# Altium PCB FPGA Board V1.PcbDoc (part 3 of 3)
Units mil, origin at the board's own origin, x right, y up, seen from the top; angles counter-clockwise.
Board outline 3460 x 2420 mil, 8 copper layers (Layer 1, Layer 2, Layer 3, Layer 4, Layer 5, Layer 6, Layer 7, Layer 8), stack 40.159 mil thick; 81 components, 311 nets, 1100 pads, 152 vias.
Unrouted connection lines stored in the file: 594.
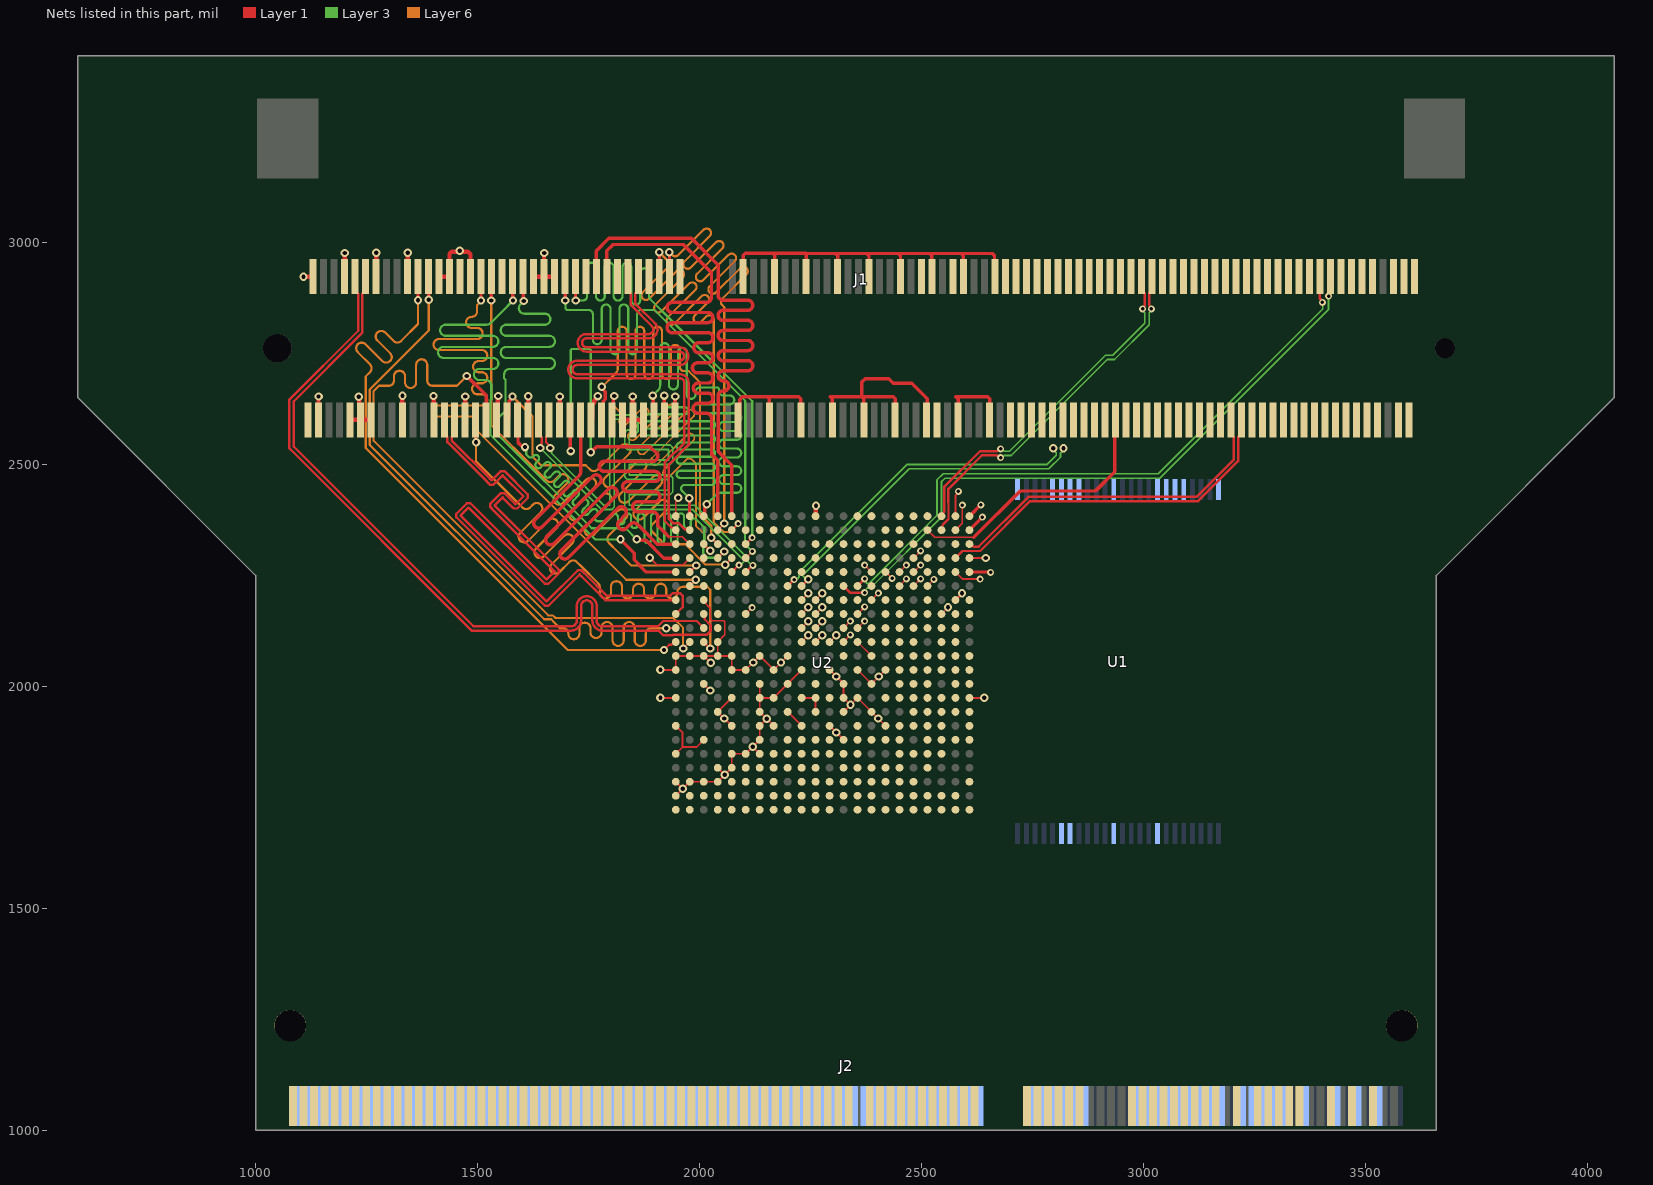
[diagram p8: the nets of this part, all layers, seen from the top]

## Via types
v1: diameter 18.9, hole 9.84, Layer 1 to Layer 8, 113 vias
v2: diameter 15.75, hole 7.87, Layer 1 to Layer 8, 39 vias

## Nets (pads, with @x,y where several pads share a name; then routed paths per layer and width w, separated by ;. In a path a pad name is that pad's centre, name@x,y a point inside that pad or via, vN(x,y) a via of type N, cw(c..) or ccw(c..) an arc to the next point about the centre after c; other vN are vias at no path point) (continued)
DQ10: J1.33 U2.C13 | length 1544.7
  Layer 1 w5: U2.C13@2009.55,2100.03 v1(2024.4,2085.18)
  Layer 1 w7.7: J1.33@1495.99,2600.17 1496.37,2599.79 1496.37,2550.13 v1(1496.75,2549.75)
  Layer 6 w4.92: v1(1496.75,2549.75) 1496.75,2507.25 1587.74,2416.26 1600.9,2403.1 ccw(c1609.71,2411.91) 1618.52,2403.1 1624.88,2409.46 cw(c1633.69,2400.65) 1642.5,2409.46 cw(c1633.69,2400.65) 1642.5,2391.84 1596.45,2345.79 ccw(c1605.27,2336.98) 1596.45,2328.16 ccw(c1605.27,2336.98) 1614.08,2328.16 1660.13,2374.21 cw(c1668.94,2365.4) 1677.75,2374.21 cw(c1668.94,2365.4) 1677.75,2356.59 1631.7,2310.54 ccw(c1640.51,2301.73) 1631.7,2292.92 ccw(c1640.51,2301.73) 1649.32,2292.92 1695.37,2338.97 cw(c1704.18,2330.16) 1712.99,2338.97 cw(c1704.18,2330.16) 1712.99,2321.34 1666.95,2275.3 ccw(c1675.76,2266.48) 1666.95,2257.67 ccw(c1675.76,2266.48) 1684.57,2257.67 1706.64,2279.74 cw(c1715.45,2270.93) 1724.26,2279.74 1726,2278 1732.97,2271.03 1771.97,2232.03 cw(c1763.16,2223.22) 1775.62,2223.22 1775.62,2210.42 ccw(c1788.08,2210.42) 1800.54,2210.42 1800.54,2224.46 cw(c1813,2224.46) 1825.46,2224.46 1825.46,2210.38 ccw(c1837.93,2210.38) 1850.39,2210.38 1850.39,2218.7 cw(c1862.85,2218.7) 1875.31,2218.7 1875.31,2210.38 ccw(c1887.77,2210.38) 1900.23,2210.38 1900.23,2218.7 cw(c1912.69,2218.7) 1925.15,2218.7 1925.15,2210.38 ccw(c1937.62,2210.38) 1950.08,2210.38 1950.08,2211.71 cw(c1962.54,2211.71) 1962.54,2224.17 1965,2224.17 2017.83,2224.17 2024.4,2217.6 v1(2024.4,2085.18)
DQ11: J1.35 U2.B13 | length 1546.6
  Layer 1 w4: v1(1963.21,2085.18) U2.B13@1978.06,2100.03
  Layer 1 w7.7: v1(1476,2699) 1519.61,2655.39 J1.35@1519.61,2600.17
  Layer 6 w4.92: v1(1476,2699) 1454,2677 1442,2677 1399.15,2677 cw(c1399.15,2689.46) 1386.69,2689.46 1386.69,2724.2 ccw(c1374.23,2724.2) 1361.77,2724.2 1361.77,2684.46 cw(c1349.31,2684.46) 1336.85,2684.46 1336.85,2698.46 ccw(c1324.38,2698.46) 1311.92,2698.46 1311.92,2689.46 cw(c1299.46,2689.46) 1299.46,2677 1297,2677 1278,2677 1266.09,2665.09 1266.09,2552.91 1659.08,2159.92 1669.7,2159.92 1675.62,2154 1941,2154 1963.21,2131.79 v1(1963.21,2085.18)
DQ12: J1.22 U2.A13 | length 1545.3
  Layer 1 w5: v1(1920,2082) 1931.98,2093.98 1937.07,2093.98 1943.12,2100.03 U2.A13@1946.56,2100.03
  Layer 1 w7.7: v1(1366,2870) J1.22@1366.04,2922.97
  Layer 6 w4.92: v1(1366,2870) 1366,2816.87 1366,2816 1328.23,2778.23 cw(c1319.42,2787.04) 1310.61,2778.23 1291.97,2796.87 ccw(c1283.16,2788.06) 1274.35,2796.87 ccw(c1283.16,2788.06) 1274.35,2779.25 1303.17,2750.43 cw(c1294.35,2741.62) 1303.17,2732.81 cw(c1294.35,2741.62) 1285.54,2732.81 1247.88,2770.47 ccw(c1239.07,2761.66) 1230.26,2770.47 ccw(c1239.07,2761.66) 1230.26,2752.84 1257.74,2725.36 cw(c1248.93,2716.55) 1257.74,2707.74 1256,2706 1248.24,2698.24 1248.24,2536.76 1703,2082 v1(1920,2082)
DQ13: J1.24 U2.A14 | length 1544.7
  Layer 1 w5: v1(1925,2131) 1925.26,2131.26 1946.3,2131.26 U2.A14@1946.56,2131.53
  Layer 1 w7.7: J1.24@1389.69,2923 1389.85,2922.85 1389.85,2871.15 v1(1390,2871)
  Layer 6 w4.92: v1(1390,2871) 1390,2801.62 1257.17,2668.79 1257.17,2543.83 1650,2151 1666,2151 1672.02,2144.98 1686,2131 1692.16,2131 cw(c1692.16,2118.54) 1704.62,2118.54 ccw(c1717.08,2118.54) 1729.54,2118.54 1729.54,2131 cw(c1742,2131) 1754.46,2131 1754.46,2121.46 ccw(c1766.93,2121.46) 1779.39,2121.46 1779.39,2132.62 cw(c1791.85,2132.62) 1804.31,2132.62 1804.31,2103.38 ccw(c1816.77,2103.38) 1829.23,2103.38 1829.23,2132.62 cw(c1841.69,2132.62) 1854.15,2132.62 1854.15,2103.38 ccw(c1866.62,2103.38) 1879.08,2103.38 1879.08,2118.54 cw(c1891.54,2118.54) 1891.54,2131 1894,2131 v1(1925,2131)
DQ14: J1.34 U2.B17 | length 1544.9
  Layer 1 w5: U2.B17@1978.06,2226.02 1978.06,2226.09 1991.98,2240.01 v1(1991.98,2240.08)
  Layer 1 w7.7: J1.34@1507.8,2923 1507.9,2922.9 1507.9,2869.1 v1(1508,2869)
  Layer 6 w4.92: v1(1508,2869) 1508,2867.95 1500.94,2860.89 1499.18,2859.13 1499.18,2844.69 cw(c1486.72,2844.69) 1486.72,2832.23 ccw(c1486.72,2819.77) 1486.72,2807.3 1499.18,2807.3 cw(c1499.18,2794.84) 1499.18,2782.38 1413.64,2782.38 ccw(c1413.64,2769.92) 1413.64,2757.46 1509.62,2757.46 cw(c1509.62,2745) 1509.62,2732.54 1502.35,2732.54 ccw(c1502.35,2720.07) 1502.35,2707.61 1509.62,2707.61 cw(c1509.62,2695.15) 1509.62,2682.69 1500.37,2682.69 ccw(c1500.37,2670.23) 1500.37,2657.77 1509.62,2657.77 cw(c1509.62,2645.31) 1509.62,2632.85 1411.64,2632.85 ccw(c1411.64,2620.38) 1411.64,2607.92 1486.72,2607.92 cw(c1486.72,2595.46) 1499.18,2595.46 1499.18,2593 1499.18,2575.82 1834.92,2240.08 v1(1991.98,2240.08)
DQ15: J1.36 U2.B18 | length 1544.7
  Layer 1 w5: U2.B18@1978.06,2257.51 v1(1992.9,2272.36)
  Layer 1 w7.7: v1(1531,2869) 1531.21,2869.21 1531.21,2922.79 J1.36@1531.42,2923
  Layer 6 w4.92: v1(1531,2869) 1531,2588 1628.26,2490.74 1655.21,2463.79 ccw(c1664.02,2472.61) 1672.83,2463.79 1683.48,2474.44 cw(c1692.29,2465.63) 1701.1,2474.44 cw(c1692.29,2465.63) 1701.1,2456.82 1674.76,2430.48 ccw(c1683.57,2421.67) 1674.76,2412.86 ccw(c1683.57,2421.67) 1692.38,2412.86 1745.64,2466.12 cw(c1754.45,2457.3) 1763.27,2466.12 cw(c1754.45,2457.3) 1763.27,2448.49 1710.01,2395.23 ccw(c1718.82,2386.42) 1710.01,2377.61 ccw(c1718.82,2386.42) 1727.63,2377.61 1780.89,2430.87 cw(c1789.7,2422.06) 1798.51,2430.87 cw(c1789.7,2422.06) 1798.51,2413.25 1745.25,2359.99 ccw(c1754.06,2351.18) 1745.25,2342.37 ccw(c1754.06,2351.18) 1762.88,2342.37 1816.13,2395.62 cw(c1824.95,2386.81) 1833.76,2395.62 cw(c1824.95,2386.81) 1833.76,2378 1796.19,2340.43 ccw(c1805,2331.62) 1796.19,2322.81 1815.55,2303.45 1846.64,2272.36 v1(1992.9,2272.36)
DQ16: J1.39 U2.E19 | length 1445.1
  Layer 1 w4: v1(2057.7,2274.16) U2.E19@2072.54,2289.01
  Layer 1 w7.7: J1.39@1566.86,2600.17 1570.88,2604.19 1570.88,2642.09 1578.73,2649.93 v1(1578.73,2652.96)
  Layer 6 w4.92: v1(1578.73,2652.96) 1624,2607.7 1624,2517 1643,2498 1744,2498 1751.5,2490.5 1753.24,2488.76 ccw(c1762.05,2497.57) 1770.86,2488.76 1823.95,2541.85 cw(c1832.76,2533.04) 1841.57,2541.85 cw(c1832.76,2533.04) 1841.57,2524.22 1787.16,2469.81 ccw(c1795.97,2461) 1787.16,2452.19 ccw(c1795.97,2461) 1804.78,2452.19 1859.2,2506.6 cw(c1868.01,2497.79) 1876.82,2506.6 cw(c1868.01,2497.79) 1876.82,2488.98 1822.4,2434.56 ccw(c1831.22,2425.75) 1822.4,2416.94 ccw(c1831.22,2425.75) 1840.03,2416.94 1894.44,2471.36 cw(c1903.25,2462.54) 1912.07,2471.36 cw(c1903.25,2462.54) 1912.07,2453.73 1855.14,2396.81 ccw(c1863.95,2388) 1855.14,2379.18 ccw(c1863.95,2388) 1872.76,2379.18 1910.11,2416.53 cw(c1918.92,2407.72) 1927.74,2416.53 cw(c1918.92,2407.72) 1927.74,2398.91 1894.22,2365.4 ccw(c1903.04,2356.59) 1894.22,2347.78 1912.68,2329.32 1922,2320 1967.77,2320 2013.61,2274.16 v1(2057.7,2274.16)
DQ17: J1.41 U2.D19 | length 1482.8
  Layer 1 w4: U2.D19@2041.05,2289.01 v1(2055.9,2303.86)
  Layer 1 w7.7: J1.41@1590.48,2600.17 1591.24,2599.41 1591.24,2549.24 1599.34,2541.14 1604.86,2541.14 v1(1607,2539)
  Layer 3 w4.92: v1(1607,2539) 1609.67,2536.33 1609.67,2527.03 1609.67,2522.33 1614.34,2517.66 ccw(c1619.61,2522.94) 1624.89,2517.66 1626.14,2518.91 cw(c1631.41,2513.64) 1636.69,2518.91 cw(c1631.41,2513.64) 1636.69,2508.36 1632.25,2503.92 ccw(c1637.53,2498.64) 1632.25,2493.37 ccw(c1637.53,2498.64) 1642.8,2493.37 1652.51,2503.08 cw(c1657.78,2497.8) 1663.06,2503.08 cw(c1657.78,2497.8) 1663.06,2492.52 1653.35,2482.82 ccw(c1658.63,2477.54) 1653.35,2472.27 ccw(c1658.63,2477.54) 1663.91,2472.27 1673.61,2481.97 cw(c1678.89,2476.7) 1684.16,2481.97 cw(c1678.89,2476.7) 1684.16,2471.42 1674.46,2461.71 ccw(c1679.73,2456.44) 1674.46,2451.16 ccw(c1679.73,2456.44) 1685.01,2451.16 1694.72,2460.87 cw(c1699.99,2455.59) 1705.27,2460.87 cw(c1699.99,2455.59) 1705.27,2450.32 1695.56,2440.61 ccw(c1700.84,2435.33) 1695.56,2430.06 ccw(c1700.84,2435.33) 1706.11,2430.06 1715.82,2439.76 cw(c1721.1,2434.49) 1726.37,2439.76 cw(c1721.1,2434.49) 1726.37,2429.21 1716.66,2419.51 ccw(c1721.94,2414.23) 1716.66,2408.95 ccw(c1721.94,2414.23) 1727.22,2408.95 1736.92,2418.66 cw(c1742.2,2413.38) 1747.47,2418.66 cw(c1742.2,2413.38) 1747.47,2408.11 1737.77,2398.4 ccw(c1743.04,2393.13) 1737.77,2387.85 ccw(c1743.04,2393.13) 1748.32,2387.85 1758.03,2397.56 cw(c1763.3,2392.28) 1768.58,2397.56 cw(c1763.3,2392.28) 1768.58,2387.01 1766.31,2384.74 ccw(c1771.59,2379.46) 1771.59,2372 1789.86,2372 1795.04,2377.19 1806.86,2389 1808.7,2389 cw(c1808.7,2381.54) 1816.16,2381.54 1816.16,2372.38 ccw(c1823.62,2372.38) 1831.08,2372.38 1831.08,2382.27 cw(c1838.54,2382.27) 1846,2382.27 1846,2364.08 ccw(c1853.46,2364.08) 1860.92,2364.08 1860.92,2382.27 cw(c1868.39,2382.27) 1875.85,2382.27 1875.85,2330.19 ccw(c1883.31,2330.19) 1890.77,2330.19 1890.77,2382.27 cw(c1898.23,2382.27) 1905.69,2382.27 1905.69,2330.19 ccw(c1913.15,2330.19) 1920.62,2330.19 1920.62,2382.27 cw(c1928.08,2382.27) 1935.54,2382.27 1935.54,2330.19 ccw(c1943,2330.19) 1950.46,2330.19 1950.46,2382.27 cw(c1957.92,2382.27) 1965.38,2382.27 1965.38,2362.21 ccw(c1972.84,2362.21) 1980.31,2362.21 1980.31,2370.68 cw(c1987.77,2370.68) 1993.04,2375.96 2006.34,2362.66 2010.61,2358.39 2010.61,2330.56 2008.45,2328.4 2008.45,2299.11 2017.82,2289.74 2041.78,2289.74 v1(2055.9,2303.86)
DQ18: J1.51 U2.B20 | length 1483.7
  Layer 1 w4: 1931,2337 1961.56,2337 U2.B20@1978.06,2320.5
  Layer 1 w7.7: J1.51@1708.59,2600.17 1709.3,2599.46 1709.3,2530.7 v1(1710,2530) ; v1(1755,2527) 1768,2540 1888.49,2540 1889.42,2539.07 1906,2522.49 1906,2518.19 cw(c1894.65,2518.19) 1894.65,2506.84 1785.69,2506.84 ccw(c1785.69,2495.49) 1785.69,2484.14 1899.42,2484.14 cw(c1899.42,2472.79) 1899.42,2461.44 1838.38,2461.44 ccw(c1838.38,2450.09) 1838.38,2438.74 1899.42,2438.74 cw(c1899.42,2427.39) 1899.42,2416.04 1860.82,2416.04 ccw(c1860.82,2404.69) 1860.82,2393.34 1894.65,2393.34 cw(c1894.65,2381.98) 1906,2381.98 1906,2362 1919,2349 1931,2337
  Layer 3 w4.92: v1(1710,2530) 1710,2757.12 1712.88,2760 1752.12,2760 1755,2757.12 v1(1755,2527)
DQ19: J1.53 U2.A20 | length 1501.6
  Layer 1 w7.7: J1.53@1732.21,2600.17 1732.21,2530.21 1732.21,2482.71 cw(c1720.86,2482.71) 1728.89,2474.69 1629.83,2375.63 ccw(c1637.85,2367.6) 1629.83,2359.58 ccw(c1637.85,2367.6) 1645.88,2359.58 1759.41,2473.11 cw(c1767.44,2465.09) 1775.47,2473.11 cw(c1767.44,2465.09) 1775.47,2457.06 1656.6,2338.19 ccw(c1664.63,2330.17) 1656.6,2322.14 ccw(c1664.63,2330.17) 1672.65,2322.14 1795.16,2444.65 cw(c1803.19,2436.63) 1811.21,2444.65 cw(c1803.19,2436.63) 1811.22,2428.6 1688.71,2306.09 ccw(c1696.73,2298.06) 1688.71,2290.04 ccw(c1696.73,2298.06) 1704.76,2290.04 1815.89,2401.17 cw(c1823.92,2393.15) 1831.94,2401.17 cw(c1823.92,2393.15) 1831.94,2385.12 1819.2,2372.38 ccw(c1827.23,2364.35) 1819.2,2356.33 ccw(c1827.23,2364.35) 1835.25,2356.33 1843.94,2365.01 cw(c1851.96,2356.99) 1859.99,2365.01 1862.71,2362.29 1904.5,2320.5 U2.A20@1946.56,2320.5
DQ20: J1.40 U2.A18 | length 1482.1
  Layer 1 w7.7: J1.40@1578.67,2923 1579.33,2922.33 1579.33,2869.67 v1(1580,2869) ; v1(1822,2331) 1853,2300 1853,2285 1880.49,2257.51 U2.A18@1946.56,2257.51
  Layer 3 w4.92: v1(1580,2869) 1554.29,2843.28 1529.21,2818.21 cw(c1520.4,2827.02) 1520.4,2814.56 1428.14,2814.56 ccw(c1428.14,2802.1) 1428.14,2789.64 1534.46,2789.64 cw(c1534.46,2777.18) 1534.46,2764.72 1423.47,2764.72 ccw(c1423.47,2752.26) 1423.47,2739.8 1534.46,2739.8 cw(c1534.46,2727.33) 1534.46,2714.87 1504.37,2714.87 ccw(c1504.37,2702.41) 1504.37,2689.95 1518.54,2689.95 cw(c1518.54,2677.49) 1531,2677.49 1531,2675.03 1531,2646.41 1529,2644.41 1529,2567 1765,2331 v1(1822,2331)
DQ21: J1.42 U2.A19 | length 1482.2
  Layer 1 w7.7: J1.42@1602.29,2923 1603.14,2922.14 1603.14,2868.86 v1(1604,2868) ; v1(1859,2331) 1861.14,2328.86 1879.6,2328.86 1919.44,2289.01 U2.A19@1946.56,2289.01
  Layer 3 w4.92: v1(1604,2868) 1603.1,2867.1 1596.73,2860.73 ccw(c1605.54,2851.92) 1605.54,2839.46 1651.64,2839.46 cw(c1651.64,2827) 1651.64,2814.54 1564.72,2814.54 ccw(c1564.72,2802.07) 1564.72,2789.61 1661.9,2789.61 cw(c1661.9,2777.15) 1661.9,2764.69 1564.72,2764.69 ccw(c1564.72,2752.23) 1564.72,2739.77 1661.9,2739.77 cw(c1661.9,2727.31) 1661.9,2714.85 1572.46,2714.85 ccw(c1572.46,2702.38) 1560,2702.38 1560,2694 1562.82,2691.18 1562.82,2675 1562.82,2620.21 1548,2605.38 1548,2565 1757,2356 1834,2356 v1(1859,2331)
DQ22: J1.50 U2.F19 | length 1482.4
  Layer 1 w4: U2.F19@2104.04,2289.01 v2(2118.89,2303.86)
  Layer 1 w7.7: J1.50@1696.78,2923 1697.39,2922.39 1697.39,2869.61 v1(1698,2869)
  Layer 3 w4.92: v1(1698,2869) 1698,2851 1701,2848 1721,2848 1749.84,2848 cw(c1749.84,2838.04) 1759.8,2838.04 1759.8,2780.6 ccw(c1769.76,2780.6) 1779.72,2780.6 1779.72,2850.12 cw(c1789.68,2850.12) 1799.64,2850.12 1799.64,2757.96 ccw(c1809.6,2757.96) 1819.56,2757.96 1819.56,2850.12 cw(c1829.53,2850.12) 1839.49,2850.12 1839.49,2757.96 ccw(c1849.45,2757.96) 1859.41,2757.96 1859.41,2838.04 cw(c1869.37,2838.04) 1869.37,2848 1871.83,2848 1898,2848 2102.99,2643.01 2102.99,2359.99 2102.65,2359.65 2102.65,2320.09 v2(2118.89,2303.86)
DQ23: J1.52 U2.F20 | length 1482
  Layer 1 w4: U2.F20@2104.04,2320.5 v2@2118.56,2335.05
  Layer 1 w7.7: J1.52@1720.4,2923 1720.7,2922.7 1720.7,2869.3 v1(1721,2869)
  Layer 3 w4.92: v1(1721,2869) 1734.46,2869 1736.92,2869 ccw(c1736.92,2878.96) 1746.88,2878.96 1746.88,2944.33 cw(c1756.85,2944.33) 1766.81,2944.33 1766.81,2878.96 ccw(c1776.77,2878.96) 1786.73,2878.96 1786.73,2944.33 cw(c1796.69,2944.33) 1806.65,2944.33 1806.65,2878.96 ccw(c1816.61,2878.96) 1826.57,2878.96 1826.57,2944.33 cw(c1836.54,2944.33) 1846.5,2944.33 1846.5,2869.48 ccw(c1856.46,2869.48) 1866.42,2869.48 1866.42,2931.68 cw(c1876.38,2931.68) 1886.34,2931.68 1886.34,2878.78 ccw(c1896.3,2878.78) 1889.26,2871.74 1937,2824 2118.89,2642.11 2118.89,2335.39 v2(2118.56,2335.07)
DQ24: J1.57 U2.D20 | length 1466.9
  Layer 1 w4: v1(2026.52,2335.03) U2.D20@2041.05,2320.5
  Layer 1 w7.7: J1.57@1779.46,2600.17 1783.48,2604.19 1783.48,2641.98 1788.21,2646.71 1788.21,2663.76 1780,2671.97 v1(1780,2675)
  Layer 6 w4.92: v1(1780,2675) 1781,2675 1808.52,2702.52 1810.98,2704.98 ccw(c1798.96,2717.01) 1815.97,2717.01 1815.97,2800.04 cw(c1825.93,2800.04) 1835.89,2800.04 1835.89,2702.61 ccw(c1845.85,2702.61) 1855.81,2702.61 1855.81,2800.04 cw(c1865.77,2800.04) 1875.73,2800.04 1875.73,2702.61 ccw(c1885.69,2702.61) 1895.66,2702.61 1895.66,2800.04 cw(c1905.62,2800.04) 1915.58,2800.04 1915.58,2702.61 ccw(c1925.54,2702.61) 1935.5,2702.61 1935.5,2759.27 cw(c1945.46,2759.27) 1955.42,2759.27 1955.42,2719.96 ccw(c1965.39,2719.96) 1965.39,2710 1976,2710 1992,2694 2000.91,2685.09 2000.91,2414.1 2000.48,2413.67 2000.48,2402.02 2001,2401.5 2001,2388 2026.52,2362.48 v1(2026.52,2335.03)
DQ25: J1.59 U2.C20 | length 1466.6
  Layer 1 w4: U2.C20@2009.55,2320.5 v1(2024.36,2305.7)
  Layer 1 w7.7: J1.59@1803.08,2600.17 1805.86,2602.95 1805.86,2651.86 v1(1808,2654)
  Layer 6 w4: v1(1808,2654) 1808,2631 1809.5,2629.5 1821.52,2617.48 cw(c1814.8,2610.76) 1821.52,2604.05 ccw(c1828.24,2597.33) 1821.52,2590.61 ccw(c1828.24,2597.33) 1834.95,2590.61 1869.17,2624.83 cw(c1875.89,2618.11) 1882.61,2624.83 cw(c1875.89,2618.11) 1882.61,2611.39 1841.69,2570.47 ccw(c1848.4,2563.76) 1841.69,2557.04 ccw(c1848.4,2563.76) 1855.12,2557.04 1930.4,2632.32 cw(c1937.12,2625.6) 1943.83,2632.32 cw(c1937.12,2625.6) 1943.83,2618.88 1863.82,2538.86 ccw(c1870.54,2532.15) 1863.82,2525.43 ccw(c1870.54,2532.15) 1877.25,2525.43 1972.3,2620.47 cw(c1979.01,2613.76) 1985.73,2620.47 cw(c1979.01,2613.76) 1985.73,2607.04 1893.14,2514.45 ccw(c1899.86,2507.73) 1893.14,2501.01 ccw(c1899.86,2507.73) 1906.57,2501.01 1972.3,2566.73 cw(c1979.01,2560.02) 1985.73,2566.73 cw(c1979.01,2560.02) 1985.73,2553.3 1920.63,2488.19 ccw(c1927.35,2481.48) 1920.63,2474.76 ccw(c1927.35,2481.48) 1934.06,2474.76 1969.93,2510.63 cw(c1976.65,2503.91) 1983.37,2510.63 1984.78,2509.22 1992.45,2501.55 1992.45,2417.6 1992.02,2417.17 1992.02,2361.68 2010.15,2343.55 2010.15,2342.85 2011.07,2341.93 2011.07,2318.99 v1(2024.36,2305.7)
DQ26: J1.67 U2.C22 | length 1505.4
  Layer 1 w7.7: v1(1895,2655) 1896.28,2653.72 1896.28,2601.45 J1.67@1897.57,2600.17 ; U2.C22@2009.55,2383.5 2011.47,2385.41 2011.47,2402.48 2016.39,2407.4 v1(2016.39,2410.43)
  Layer 3 w4.92: v1(1895,2655) 1904,2664 1906.46,2666.46 ccw(c1894.44,2678.49) 1911.44,2678.49 1911.44,2763.04 cw(c1921.4,2763.04) 1931.37,2763.04 1931.37,2678.87 ccw(c1941.33,2678.87) 1951.29,2678.87 1951.29,2752.21 cw(c1961.25,2752.21) 1971.21,2752.21 1971.21,2657.59 ccw(c1981.17,2657.59) 1991.13,2657.59 1991.13,2663.04 cw(c2001.09,2663.04) 2001.09,2673 2028,2673 2041.12,2673 2044,2670.12 2044,2667.51 2044,2665.04 ccw(c2053.96,2665.04) 2053.96,2655.08 2068.34,2655.08 cw(c2068.34,2645.12) 2068.34,2635.16 1993.92,2635.16 ccw(c1993.92,2625.2) 1993.92,2615.24 2084.11,2615.24 cw(c2084.11,2605.28) 2084.11,2595.31 2053.96,2595.31 ccw(c2053.96,2585.35) 2053.96,2575.39 2084.11,2575.39 cw(c2084.11,2565.43) 2084.11,2555.47 2053.96,2555.47 ccw(c2053.96,2545.51) 2053.96,2535.55 2084.11,2535.55 cw(c2084.11,2525.59) 2084.11,2515.62 2053.9,2515.62 ccw(c2053.9,2505.66) 2053.9,2495.7 2084.11,2495.7 cw(c2084.11,2485.74) 2084.11,2475.78 2053.96,2475.78 ccw(c2053.96,2465.82) 2053.96,2455.86 2084.11,2455.86 cw(c2084.11,2445.89) 2084.11,2435.93 2046.02,2435.93 ccw(c2046.02,2425.97) 2038.98,2433.02 2019.34,2413.38 v1(2016.39,2410.43)
DQ27: J1.69 U2.B22 | length 1503.9
  Layer 1 w7.7: v1(1921,2655) 1921.09,2654.91 1921.09,2600.26 J1.69@1921.19,2600.17 ; v1(1977,2424) 1977.53,2423.47 1977.53,2384.02 U2.B22@1978.06,2383.5
  Layer 3 w4.92: v1(1921,2655) 1921,2653.44 1921,2636.8 ccw(c1928.96,2636.8) 1928.96,2628.84 1967.07,2628.84 cw(c1967.07,2620.87) 1967.07,2612.91 1877.65,2612.91 ccw(c1877.65,2604.95) 1877.65,2596.99 2027.12,2596.99 cw(c2027.12,2589.03) 2027.12,2581.07 1877.65,2581.07 ccw(c1877.65,2573.11) 1877.65,2565.14 2027.12,2565.14 cw(c2027.12,2557.18) 2027.12,2549.22 1956.42,2549.22 ccw(c1956.42,2541.26) 1956.42,2533.3 2027.12,2533.3 cw(c2027.12,2525.34) 2027.12,2517.38 1956.42,2517.38 ccw(c1956.42,2509.42) 1956.42,2501.45 2027.12,2501.45 cw(c2027.12,2493.49) 2027.12,2485.53 1956.42,2485.53 ccw(c1956.42,2477.57) 1956.42,2469.61 2027.12,2469.61 cw(c2027.12,2461.65) 2027.12,2453.69 1966.53,2453.69 ccw(c1966.53,2445.73) 1960.9,2440.1 1969.68,2431.32 v1(1977,2424)
DQ28: J1.56 U2.E22 | length 1523.3
  Layer 1 w7.7: J1.56@1767.64,2923 1767.64,2980.64 1796,3009 1982,3009 2042,2949 2042,2885 2042,2881.15 ccw(c2053.35,2881.15) 2053.35,2869.8 2108.86,2869.8 cw(c2108.86,2858.45) 2108.86,2847.1 2053.35,2847.1 ccw(c2053.35,2835.75) 2053.35,2824.4 2108.86,2824.4 cw(c2108.86,2813.05) 2108.86,2801.7 2053.35,2801.7 ccw(c2053.35,2790.35) 2053.35,2779 2108.86,2779 cw(c2108.86,2767.65) 2108.86,2756.29 2053.35,2756.29 ccw(c2053.35,2744.94) 2053.35,2733.59 2108.86,2733.59 cw(c2108.86,2722.24) 2108.86,2710.89 2053.35,2710.89 ccw(c2053.35,2699.54) 2053.35,2688.19 2054.81,2688.19 cw(c2054.81,2676.84) 2054.81,2665.49 2053.35,2665.49 ccw(c2053.35,2654.14) 2042,2654.14 2042,2635.35 2042,2529 2072.54,2498.46 U2.E22@2072.54,2383.5
DQ29: J1.58 U2.D22 | length 1525.3
  Layer 1 w7.7: J1.58@1791.27,2923 1791.27,2980.75 1805.81,2995.3 1963.7,2995.3 2027,2932 2027,2902.72 2027,2876.17 cw(c2015.65,2876.17) 2015.65,2864.82 1938.35,2864.82 ccw(c1938.35,2853.47) 1938.35,2842.12 2018.95,2842.12 cw(c2018.95,2830.77) 2018.95,2819.42 1938.35,2819.42 ccw(c1938.35,2808.07) 1938.35,2796.72 2018.95,2796.72 cw(c2018.95,2785.37) 2018.95,2774.02 1998.35,2774.02 ccw(c1998.35,2762.67) 1998.35,2751.32 2018.95,2751.32 cw(c2018.95,2739.97) 2018.95,2728.62 1995.44,2728.62 ccw(c1995.44,2717.27) 1995.44,2705.92 2018.95,2705.92 cw(c2018.95,2694.57) 2018.95,2683.22 1997.51,2683.22 ccw(c1997.51,2671.87) 1997.51,2660.51 2018.95,2660.51 cw(c2018.95,2649.16) 2018.95,2637.81 1997.51,2637.81 ccw(c1997.51,2626.46) 1997.51,2615.11 2015.65,2615.11 cw(c2015.65,2603.76) 2027,2603.76 2027,2575.9 2027,2523 2041.05,2508.95 U2.D22@2041.05,2383.5
DQ30: J1.68 U2.E21 | length 1465.5
  Layer 1 w4: U2.E21@2072.54,2352 v2(2087.08,2366.58)
  Layer 1 w7.7: v1(1909.1,2978) 1909.24,2977.86 1909.24,2923.14 J1.68@1909.38,2923
  Layer 6 w4.92: v1(1909.1,2978) 1913.17,2973.93 1929,2958.1 cw(c1921.95,2951.06) 1929,2944.02 1872.37,2887.39 ccw(c1879.42,2880.35) 1872.37,2873.31 ccw(c1879.42,2880.35) 1886.46,2873.31 1948.22,2935.07 cw(c1955.27,2928.03) 1962.31,2935.07 cw(c1955.27,2928.03) 1962.31,2920.98 1900.55,2859.22 ccw(c1907.59,2852.18) 1900.55,2845.13 ccw(c1907.59,2852.18) 1914.64,2845.13 1976.4,2906.89 cw(c1983.44,2899.85) 1990.49,2906.9 cw(c1983.44,2899.85) 1990.49,2892.81 1928.72,2831.04 ccw(c1935.77,2824) 1928.72,2816.96 ccw(c1935.77,2824) 1942.81,2816.96 2004.57,2878.72 cw(c2011.62,2871.68) 2018.66,2878.72 cw(c2011.62,2871.68) 2018.66,2864.63 1989.49,2835.46 ccw(c1996.53,2828.42) 1989.49,2821.38 ; 1989.49,2821.37 ccw(c1996.53,2828.42) 2003.58,2821.37 ; 2003.58,2821.38 2015.3,2833.1 cw(c2022.34,2826.05) 2032.3,2826.05 2032.3,2814.84 2032.3,2369.31 2039.99,2361.63 2039.99,2360.26 2049.31,2350.94 2051.06,2350.94 2054,2348 2068.51,2348 v2(2087.08,2366.58)
DQ31: J1.70 U2.D21 | length 1465.6
  Layer 1 w4: U2.D21@2041.05,2352 v1(2055.9,2366.85)
  Layer 1 w7.7: v1(1932,2978) 1932.5,2977.5 1932.5,2923.5 J1.70@1933,2923
  Layer 6 w4.92: v1(1932,2978) 1936.58,2973.42 1938.32,2971.68 ccw(c1945.36,2978.72) 1952.41,2971.68 2009.03,3028.3 cw(c2016.08,3021.26) 2023.12,3028.3 cw(c2016.08,3021.26) 2023.12,3014.21 1966.5,2957.59 ccw(c1973.54,2950.55) 1966.5,2943.5 ccw(c1973.54,2950.55) 1980.58,2943.5 2037.21,3000.13 cw(c2044.25,2993.08) 2051.29,3000.13 cw(c2044.25,2993.08) 2051.29,2986.04 1994.67,2929.42 ccw(c2001.71,2922.37) 1994.67,2915.33 ccw(c2001.71,2922.37) 2008.76,2915.33 2065.38,2971.95 cw(c2072.42,2964.91) 2079.47,2971.95 cw(c2072.42,2964.91) 2079.47,2957.87 2022.85,2901.24 ccw(c2029.89,2894.2) 2022.85,2887.15 ccw(c2029.89,2894.2) 2036.93,2887.15 2091.85,2942.07 cw(c2098.89,2935.03) 2105.94,2942.07 cw(c2098.89,2935.03) 2105.94,2927.98 2051.02,2873.07 ccw(c2058.06,2866.02) 2051.02,2858.98 2055.9,2854.1 2055.9,2816.9 v1(2055.9,2366.85)
DQ32: J1.129 U2.K13 | length 21
  Layer 1 w4: U2.K13@2230.02,2100.03 v1(2244.87,2114.88)
DQ33: J1.131 U2.K14 | length 21
  Layer 1 w4: U2.K14@2230.02,2131.53 v1(2244.87,2146.38)
DQ34: J1.141 U2.M13 | length 21
  Layer 1 w4: U2.M13@2293.02,2100.03 v1(2307.86,2114.88)
DQ35: J1.143 U2.L13 | length 21
  Layer 1 w4: U2.L13@2261.52,2100.03 v1(2276.37,2114.88)
DQ36: J1.130 U2.L14 | length 21
  Layer 1 w4: U2.L14@2261.52,2131.53 v1(2276.37,2146.38)
DQ37: J1.132 U2.L15 | length 21
  Layer 1 w4: U2.L15@2261.52,2163.02 v1(2276.37,2177.87)
DQ38: J1.140 U2.L16 | length 21
  Layer 1 w4: U2.L16@2261.52,2194.52 v1(2276.37,2209.37)
DQ39: J1.142 U2.K16 | length 21
  Layer 1 w4: U2.K16@2230.02,2194.52 v1(2244.87,2209.37)
DQ40: J1.147 U2.W21 | length 607
  Layer 1 w4: U2.W21@2513.49,2352 2529.49,2336 2618,2336
  Layer 1 w7.7: 2618,2336 2722,2440 2892,2440 2935,2483 2935,2598.23 J1.147@2936.94,2600.17
DQ41: J1.149 U2.W22
DQ42: J1.157 U2.AA20
DQ43: J1.159 U2.AA21 | length 62.4
  Layer 1 w4: U2.AA21@2576.48,2352 2592,2367.52 v2(2592,2408)
DQ44: J1.146 U2.AB21 | length 41
  Layer 1 w7.7: U2.AB21@2607.98,2352 v2(2637,2381)
DQ45: J1.148 U2.AB22 | length 36.6
  Layer 1 w7.7: U2.AB22@2607.98,2383.5 2608.24,2383.5 2633.74,2409 v2(2634,2409)
DQ46: J1.158 U2.U20
DQ47: J1.160 U2.V20
DQ48: J1.163 U2.V18 | length 22.4
  Layer 1 w4: U2.V18@2481.99,2257.51 2482.25,2257.51 2497.74,2273 v2(2498,2273)
DQ49: J1.165 U2.V19 | length 22.6
  Layer 1 w4: U2.V19@2481.99,2289.01 v2(2498,2305)
DQ50: J1.175 U2.V17 | length 22.6
  Layer 1 w4: U2.V17@2481.99,2226.02 v2(2498,2242)
DQ51: J1.177 U2.W17 | length 21
  Layer 1 w4: U2.W17@2513.49,2226.02 2513.49,2226.25 2528,2240.76 v2(2528,2241)
DQ52: J1.164 U2.AA18 | length 62
  Layer 1 w4: U2.AA18@2576.48,2257.51 2591.99,2242 2631.79,2242 v2(2632,2241.79)
DQ53: J1.166 U2.AB18 | length 48.2
  Layer 1 w7.7: U2.AB18@2607.98,2257.51 2655.49,2257.51 v2(2656,2257)
DQ54: J1.174 U2.U17 | length 22.4
  Layer 1 w4: U2.U17@2450.5,2226.02 2450.5,2226.26 2466,2241.76 v2(2466,2242)
DQ55: J1.176 U2.U18 | length 21.9
  Layer 1 w4: U2.U18@2450.5,2257.51 v2(2466,2273)
DQ56: J1.181 U2.P14 | length 22.4
  Layer 1 w4: U2.P14@2356.01,2131.53 2356.27,2131.53 2371.74,2147 v2(2372,2147)
DQ57: J1.183 U2.R14
DQ58: J1.191 U2.R18 | length 21.9
  Layer 1 w4: v2(2372,2273) U2.R18@2387.5,2257.51
DQ59: J1.193 U2.T18 | length 21
  Layer 1 w4: U2.T18@2419,2257.51 2419.24,2257.51 2433.76,2243 v2(2434,2243)
DQ60: J1.180 U2.P15 | length 22.6
  Layer 1 w4: U2.P15@2356.01,2163.02 v2(2372,2179)
DQ61: J1.182 U2.R16 | length 21.9
  Layer 1 w4: U2.R16@2387.5,2194.52 v2(2403,2210)
DQ62: J1.192 U2.N13 | length 22.4
  Layer 1 w4: U2.N13@2324.51,2100.03 2324.51,2100.27 2340,2115.76 v2(2340,2116)
DQ63: J1.194 U2.N14 | length 21.9
  Layer 1 w4: U2.N14@2324.51,2131.53 v2(2340,2147)
DQS0_N: J1.10 U2.C15 | length 1731.6
  Layer 1 w5.54: J1.10@1224.34,2923 1224.34,2891.5 1231.38,2884.46 1231.38,2800.87 1076.46,2645.95 1076.46,2536.05 1079.25,2533.25 1486.74,2125.77 1703.43,2125.77 1710.97,2125.77 ccw(c1710.97,2148.08) 1733.28,2148.08 1733.28,2180.88 cw(c1746.05,2180.88) 1746.05,2193.65 cw(c1746.05,2180.88) 1758.82,2180.88 1758.82,2148.08 ccw(c1781.12,2148.08) 1781.12,2125.77 1807.88,2125.77 1907.29,2125.77 1918.28,2114.78 1939.21,2114.78 1940.33,2115.9 2016.03,2115.9 2025.18,2125.05 2025.18,2138 2011.88,2151.3 2011.88,2160.69 U2.C15@2009.55,2163.02
DQS0_P: J1.12 U2.C14 | length 1658.4
  Layer 1 w5.54: J1.12@1247.96,2923 1247.96,2891.5 1240.92,2884.46 1240.92,2796.92 1086,2642 1086,2540 1490.69,2135.31 1703.43,2135.31 1710.97,2135.31 ccw(c1710.97,2148.08) 1723.74,2148.08 1723.74,2180.88 cw(c1746.05,2180.88) 1746.05,2203.19 cw(c1746.05,2180.88) 1768.35,2180.88 1768.35,2148.08 ccw(c1781.12,2148.08) 1781.12,2135.31 1807.88,2135.31 1906.37,2135.31 1918.28,2147.22 1993.86,2147.22 U2.C14@2009.55,2131.53
DQS1_N: J1.27 U2.A16 | length 1554.6
  Layer 1 w5.54: J1.27@1425.13,2600.17 1425.13,2568.67 1432.17,2561.63 1432.17,2550.08 1521.06,2461.19 1524.99,2457.25 1527.78,2454.46 1535.69,2454.46 1556.54,2475.31 1603.59,2428.26 1585.53,2410.2 1560.49,2435.24 1552.59,2435.24 1528.94,2411.6 1528.94,2403.69 1531.73,2400.9 1673.84,2258.8 1655.78,2240.74 1484.1,2412.41 1476.2,2412.41 1452.55,2388.77 1452.55,2380.87 1651.83,2181.59 1659.73,2181.59 1730.19,2252.05 1734.12,2248.12 1787.92,2194.32 1946.36,2194.32 U2.A16@1946.56,2194.52
DQS1_P: J1.29 U2.A15 | length 1606.7
  Layer 1 w5.54: J1.29@1448.75,2600.17 1448.75,2568.67 1441.71,2561.63 1441.71,2554.03 1527.8,2467.93 1531.73,2464 1552.59,2484.85 1560.49,2484.85 1613.13,2432.21 1613.13,2424.31 1589.48,2400.66 1581.58,2400.66 1580.2,2402.04 cw(c1583.56,2405.43) 1580.16,2402.08 1556.54,2425.7 1538.48,2407.65 1683.37,2262.75 1683.37,2254.85 1659.73,2231.2 1651.83,2231.2 1480.15,2402.88 1462.09,2384.82 1655.78,2191.13 1726.24,2261.59 1734.14,2261.59 1736.93,2258.8 1740.87,2254.87 1791.87,2203.86 1933.61,2203.86 1939.9,2210.15 1955.76,2210.15 1962.19,2203.72 1962.19,2178.65 U2.A15@1946.56,2163.02
DQS2_N: J1.45 U2.E18 | length 1486.3
  Layer 1 w5.54: J1.45@1637.72,2600.17 1637.72,2568.67 1644.77,2561.63 1644.77,2546.92 1643.66,2545.82 1643.66,2539.56 v1(1641.1,2537) ; U2.E18@2072.54,2257.51 2073.03,2257.51 2088.52,2273 v2(2089,2273)
  Layer 3 w4: v1(1641.1,2537) 1779.91,2398.19 1793,2398.19 1801.99,2398.19 1807.78,2403.98 1807.78,2601.48 1851.35,2601.48 1851.35,2577.48 1837.56,2577.48 1831.78,2571.69 1831.78,2539.5 1837.56,2533.71 1930.12,2533.71 1930.12,2509.71 1837.56,2509.71 1831.77,2503.93 1831.77,2471.74 1837.56,2465.95 1930.12,2465.95 1930.12,2441.95 1837.56,2441.95 1831.77,2436.16 1831.77,2403.98 1837.56,2398.19 1942,2398.19 1985.21,2398.19 2099.63,2283.77 2099.63,2280.46 2092.17,2273 v2(2089,2273)
DQS2_P: J1.47 U2.F18 | length 1483
  Layer 1 w5.54: J1.47@1661.35,2600.17 1661.35,2568.67 1654.3,2561.63 1654.3,2549.94 1664,2540.24 v1(1664,2537) ; U2.F18@2104.04,2257.51 2104.49,2257.51 2119.69,2272.72 v2(2120.14,2272.72)
  Layer 3 w4: v1(1664,2537) 1666.46,2534.54 1666.46,2525.61 1784,2408.07 1793,2408.07 1797.89,2408.07 1797.89,2605.57 1803.68,2611.36 1855.44,2611.36 1861.23,2605.57 1861.23,2573.38 1855.44,2567.59 1841.66,2567.59 1841.66,2543.59 1934.21,2543.59 1940,2537.81 1940,2505.62 1934.21,2499.83 1841.66,2499.83 1841.66,2475.83 1934.21,2475.83 1940,2470.04 1940,2437.86 1934.21,2432.07 1841.66,2432.07 1841.66,2408.07 1942,2408.07 1989.3,2408.07 2109.51,2287.86 2109.51,2280.46 2117.25,2272.72 v2(2120.14,2272.72)
DQS3_N: J1.62 U2.A21 | length 1505.9
  Layer 1 w5.54: J1.62@1838.51,2923 1838.51,2891.5 1845.55,2884.46 1845.55,2876.76 1845.55,2858.58 1892.98,2811.16 cw(c1885.76,2803.85) 1885.76,2793.58 1745.74,2793.58 ccw(c1745.74,2773.77) 1725.94,2773.77 ccw(c1745.74,2773.77) 1745.74,2753.97 1955.19,2753.97 cw(c1955.19,2743.7) 1965.46,2743.7 cw(c1955.19,2743.7) 1955.19,2733.43 1724.43,2733.43 ccw(c1724.43,2713.62) 1704.62,2713.62 ccw(c1724.43,2713.62) 1724.43,2693.81 1955.73,2693.81 cw(c1955.73,2683.54) 1966,2683.54 1966,2676 1966,2548.49 1921.39,2503.88 1921.39,2373.07 1936.14,2358.33 1937.23,2358.33 1943.56,2352 U2.A21@1946.56,2352
DQS3_P: J1.64 U2.B21 | length 1525.2
  Layer 1 w5.54: J1.64@1862.13,2923 1862.13,2891.5 1855.09,2884.46 1855.09,2876.76 1855.09,2862.53 1899.74,2817.88 cw(c1885.76,2803.85) 1899.79,2817.83 1901.16,2816.46 1901.16,2816.31 cw(c1885.76,2803.85) 1885.76,2784.04 1745.74,2784.04 ccw(c1745.74,2773.77) 1735.47,2773.77 ccw(c1745.74,2773.77) 1745.74,2763.5 1955.19,2763.5 cw(c1955.19,2743.7) 1974.99,2743.7 cw(c1955.19,2743.7) 1955.19,2723.89 1724.43,2723.89 ccw(c1724.43,2713.62) 1714.16,2713.62 ccw(c1724.43,2713.62) 1724.43,2703.35 1955.73,2703.35 cw(c1955.73,2683.54) 1975.54,2683.54 1975.54,2676 1975.54,2544.54 1930.93,2499.93 1930.93,2377.02 1940.09,2367.87 1952.79,2367.87 1966.33,2354.33 1975.73,2354.33 U2.B21@1978.06,2352
DQS4_N: J1.135 U2.J17 | length 750.9
  Layer 1 w5.54: U2.J17@2198.53,2226.02 v2(2213.05,2240.58)
  Layer 3 w4: v2(2213.05,2240.58) 2215.3,2242.83 2220.93,2242.83 2224.02,2245.92 2224.02,2255.84 2468.19,2500 2782.85,2500 2803.51,2520.66 2803.51,2526.21 2797,2532.72 v1(2797,2536)
DQS4_P: J1.137 U2.K17 | length 749.7
  Layer 1 w5.54: U2.K17@2230.02,2226.02 v1(2244.87,2240.86)
  Layer 3 w4: v1(2244.87,2240.86) 2241.47,2240.86 2233.9,2248.43 2233.9,2251.74 2472.28,2490.12 2786.94,2490.12 2813.39,2516.57 2813.39,2526.21 2819.9,2532.72 v1(2819.9,2536)
DQS5_N: J1.152 U2.Y22 | length 788.9
  Layer 1 w5.54: U2.Y22@2544.98,2383.5 2544.98,2386.5 2551.31,2392.83 2551.31,2410.38 2551,2410.69 2551,2448.71 2631.94,2529.64 2670.13,2529.64 2675.24,2534.75 v2(2678,2534.75) ; J1.152@2995.99,2923 2995.99,2891.5 3003.03,2884.46 3003.03,2872.91 3003.1,2872.84 3003.1,2857.87 2998,2852.76 v2(2998,2850)
  Layer 3 w4: v2(2678,2534.75) 2681.18,2534.75 2686.11,2529.81 2698.25,2529.81 2914.44,2746 2930.66,2746 3002.93,2818.28 3002.93,2841.89 2998,2846.82 v2(2998,2850)
DQS5_P: J1.154 U2.Y21 | length 824.9
  Layer 1 w5.54: U2.Y21@2544.98,2352 2547.31,2354.33 2547.31,2363.72 2560.85,2377.26 2560.85,2414.33 2560.54,2414.64 2560.54,2444.76 2635.89,2520.1 2670.13,2520.1 2675.24,2515 v2(2678,2515) ; v2(3017.75,2850) 3017.75,2852.76 3012.64,2857.87 3012.64,2876.79 3012.57,2876.86 3012.57,2884.46 3019.61,2891.5 J1.154@3019.61,2923
  Layer 3 w4: v2(2678,2515) 2681.18,2515 2686.11,2519.93 2702.35,2519.93 2918.53,2736.12 2934.75,2736.12 3012.81,2814.18 3012.81,2841.89 3017.75,2846.82 v2(3017.75,2850)
DQS6_N: J1.169 U2.AB20 | length 771.6
  Layer 1 w5.54: U2.AB20@2607.98,2320.5 2611.27,2320.5 2617.24,2314.54 2628.54,2314.54 2740.75,2426.74 3119.25,2426.74 3203.82,2511.31 3203.82,2561.63 3196.78,2568.67 J1.169@3196.78,2600.17
DQS6_P: J1.171 U2.AA19 | length 823
  Layer 1 w5.54: U2.AA19@2576.48,2289.01 2592.35,2304.88 2632.37,2304.88 2744.7,2417.21 3123.21,2417.21 3213.36,2507.36 3213.36,2561.63 3220.4,2568.67 J1.171@3220.4,2600.17
DQS7_N: J1.186 U2.P17 | length 1440.4
  Layer 1 w5.54: U2.P17@2356.01,2226.02 v2(2372,2242) ; J1.186@3397.57,2923 3397.57,2873.2 3403,2867.76 v2(3403,2865)
  Layer 3 w4: v2(2372,2242) 2372,2238.82 2375.4,2235.42 2375.4,2233.78 2377.75,2231.44 2381.06,2231.44 2535,2385.38 2535,2465.09 2548.79,2478.88 3032.88,2478.88 3404,2850 3404,2864 v2(3403,2865)
DQS7_P: J1.188 U2.N17 | length 1488.7
  Layer 1 w5.54: U2.N17@2324.51,2226.02 2340.14,2210.39 2371.39,2210.39 v2(2372,2211) ; v2(3416.96,2878.96) 3418.92,2880.92 3418.92,2920.73 J1.188@3421.19,2923
  Layer 3 w4: v2(2372,2211) 2372,2214.18 2375.4,2217.58 2375.4,2219.22 2377.75,2221.56 2385.15,2221.56 2544.88,2381.29 2544.88,2461 2552.88,2469 3036.97,2469 3416.96,2848.99 v2(3416.96,2878.96)
EIO0: U2.J16
EIO1: U2.K18
EIO2: U2.K19
EIO3: J2.98 U2.L19
EIO4: J2.99 U2.L20
EIO5: J2.189 U2.L18
EIO6: J2.191 U2.N18
EIO7: J2.192 U2.N19
EIO8: J2.193 U2.N20
EIO9: J2.194 U2.M20
EIO10: J2.196 U2.M15
EIO11: J2.197 U2.M16
EIO12: J2.198 U2.M17
EIO13: J2.199 U2.F15 | length 20.6
  Layer 1 w4: U2.F15@2104.04,2163.02 v2(2118.56,2177.59)
EIO14: J2.201 U2.D15 | length 0
EIO15: J2.202 U2.D17
EIO16: J2.203 U2.C17
EIO17: J2.204 U2.C18
EIO18: U2.C19
EIO19: U2.G21
EIO20: U2.G22
EIO21: U2.F21
EIO22: U2.P20
EIO23: U2.V22
EIO24: U2.T21
EIO25: U2.U21
EIO26: U2.P19
EIO27: U2.R19
EIO28: U2.T20
EIO29: U2.W19
EIO30: U2.W20
EIO31: U2.Y18
EIO32: U2.Y19
EIO33: U2.P16
EIO34: U2.R17
EIO35: U2.N15
FCS: J2.29 U2.T19
G0: J2.38 U2.Y2
G1: J2.40 U2.W1
G2: J2.42 U2.Y1
G3: J2.44 U2.U3
G4: J2.46 U2.V3
G5: J2.48 U2.AA1
G6: J2.50 U2.AB1
G7: J2.52 U2.AB3
GND: C1.1 C2.1 C3.1 C4.1 C5.1 C6.1 C7.1 C8.1 C9.1 C10.1 C11.1 C12.1 C13.1 C14.1 C15.1 C16.1 C17.1 C18.1 C19.1 C20.1 C21.1 C22.1 C23.1 C24.1 C25.1 C26.1 C27.1 C28.1 C29.1 C30.1 C31.1 C32.1 C33.1 C34.1 C35.1 C36.1 C37.1 C38.1 C39.1 C40.1 C41.1 C42.2 C43.1 C44.2 C45.1 C46.2 C47.1 C48.2 C49.1 C50.2 C51.1 C52.2 C53.1 C54.1 C55.1 C56.1 C57.1 C58.1 C59.1 C60.1 C61.1 C62.1 J1.2 J1.3 J1.8 J1.9 J1.11 J1.13 J1.14 J1.19 J1.20 J1.25 J1.26 J1.28 J1.31 J1.32 J1.37 J1.38 J1.43 J1.44 J1.46 J1.48 J1.49 J1.54 J1.55 J1.60 J1.61 J1.63 J1.65 J1.66 J1.71 J1.72 J1.127 J1.128 J1.133 J1.134 J1.136 J1.138 J1.139 J1.144 J1.145 J1.150 J1.151 J1.153 J1.155 J1.156 J1.161 J1.162 J1.167 J1.168 J1.170 J1.172 J1.173 J1.178 J1.179 J1.184 J1.185 J1.187 J1.189 J1.190 J1.195 J1.196 J2.5 J2.6 J2.9 J2.10 J2.13 J2.14 J2.19 J2.20 J2.23 J2.27 J2.28 J2.35 J2.36 J2.61 J2.62 J2.65 J2.69 J2.70 J2.89 J2.90 J2.93 J2.94 J2.105 J2.110 J2.115 J2.120 J2.125 J2.130 J2.135 J2.140 J2.145 J2.150 J2.155 J2.160 J2.165 J2.170 J2.175 J2.180 J2.185 J2.190 J2.195 J2.200 P1.3 P2.3 P3.3 Q1.2 TP1.1 U1.13 U1.25 U1.36 U1.48 U2.A2 U2.A3 U2.A5 U2.A7 U2.A9 U2.A11 U2.A12 U2.A22 U2.AA2 U2.AA12 U2.AA22 U2.AB9 U2.AB19 U2.B3 U2.B12 U2.B19 U2.C3 U2.C6 U2.C10 U2.C12 U2.C16 U2.D3 U2.D4 U2.D8 U2.D12 U2.D13 U2.E4 U2.E5 U2.E7 U2.E9 U2.E11 U2.E12 U2.E20 U2.F5 U2.F11 U2.F17 U2.G5 U2.G6 U2.G7 U2.G8 U2.G9 U2.G10 U2.G12 U2.G14 U2.H1 U2.H7 U2.H9 U2.H11 U2.H21 U2.J8 U2.J10 U2.J12 U2.J18 U2.K5 U2.K7 U2.K9 U2.K11 U2.K15 U2.L2 U2.L8 U2.L9 U2.L22 U2.M7 U2.M11 U2.M19 U2.N6 U2.N8 U2.N9 U2.N10 U2.N16 U2.P3 U2.P7 U2.P9 U2.P11 U2.P13 U2.R8 U2.R10 U2.R12 U2.R20 U2.T7 U2.T9 U2.T11 U2.T17 U2.U4 U2.U14 U2.U22 U2.V1 U2.V11 U2.V21 U2.W8 U2.W18 U2.Y5 U2.Y15 | length 3586.4
  Layer 1 w4: v1(1888,2290) 1903.85,2274.15 1963.2,2274.15 U2.B19@1978.06,2289.01 ; v1(1912.05,1974.05) U2.A9@1946.56,1974.05 ; v1(1912.04,2037.04) U2.A11@1946.56,2037.04 U2.A12@1946.56,2068.54 U2.B12@1978.06,2068.54 U2.C12@2009.55,2068.54 ; U2.A3@1946.56,1785.07 v1(1962.28,1769.35) ; U2.A5@1946.56,1848.06 1962.02,1863.53 ; U2.A7@1946.56,1911.06 1962.02,1895.59 1962.02,1863.53 ; U2.A22@1946.56,2383.5 1946.56,2415.53 1952,2420.97 v1(1952,2425) ; v1(1962.28,1769.35) U2.A2@1946.56,1753.58 U2.B3@1978.06,1785.07 U2.C3@2009.55,1785.07 U2.D3@2041.05,1785.07 U2.E4@2072.54,1816.57 U2.E5@2072.54,1848.06 U2.F5@2104.04,1848.06 ; U2.C6@2009.55,1879.56 1993.52,1863.53 1962.02,1863.53 ; U2.C10@2009.55,2005.54 v1(2024.4,1990.69) ; U2.C16@2009.55,2194.52 2009.55,2191.13 2024.41,2176.28 2024.41,2152.59 2029,2148 2054.66,2148 2057,2145.66 2057,2115.98 U2.D13@2041.05,2100.03 U2.D12@2041.05,2068.54 ; v1(2025.3,2052.84) U2.C12@2009.55,2068.54 U2.D12@2041.05,2068.54 ; v1(2025.3,2052.84) v1@2028.14,2050 ; U2.D3@2041.05,1785.07 v1(2056.77,1800.85) ; U2.D4@2041.05,1816.57 v1(2056.77,1800.85) ; U2.E7@2072.54,1911.06 U2.D8@2041.05,1942.55 U2.E9@2072.54,1974.05 ; U2.G5@2135.54,1848.06 v1(2119.81,1863.79) U2.F5@2104.07,1848.06 ; U2.G10@2135.54,2005.54 U2.G9@2135.54,1974.05 ; U2.H7@2167.03,1911.06 U2.G8@2135.54,1942.55 ; U2.J8@2198.53,1942.55 U2.K7@2230.02,1911.06 ; U2.J12@2198.53,2068.54 v1(2183.68,2053.69) U2.H11@2167.03,2037.04 U2.G12@2135.54,2068.54 v1(2120.69,2053.69) U2.F11@2104.04,2037.04 U2.E11@2072.54,2037.04 U2.E12@2072.54,2068.54 U2.D12@2041.05,2068.54 ; U2.K9@2230.02,1974.05 U2.L9@2261.52,1974.05 U2.L8@2261.52,1942.55 ; U2.K11@2230.02,2037.04 U2.J10@2198.53,2005.54 U2.H9@2167.03,1974.05 U2.G9@2135.54,1974.05 ; U2.K15@2230.02,2163.02 v1(2244.87,2177.87) ; U2.M7@2293.02,1911.06 U2.N6@2324.51,1879.56 ; U2.M11@2293.02,2037.04 U2.N10@2324.51,2005.54 U2.N9@2324.51,1974.05 v1(2340.23,1958.33) ; U2.N8@2324.51,1942.55 U2.P9@2356.01,1974.05 U2.R8@2387.5,1942.55 U2.T7@2419,1911.06 ; U2.N8@2324.51,1942.55 v1(2340.23,1958.33) ; U2.P11@2356.01,2037.04 U2.R10@2387.5,2005.54 v1(2404.15,2022.19) U2.T11@2419,2037.04 ; U2.P13@2356.01,2100.03 U2.R12@2387.5,2068.54 ; U2.Y15@2544.98,2163.02 v1(2559.83,2177.87) ; U2.AA22@2576.48,2383.5 2576.48,2429.3 2583,2435.82 v2(2583,2439) ; U2.AB9@2607.98,1974.05 v1(2641.02,1974.03) ; U2.AB19@2607.98,2289.01 v1(2645.02,2289.03) ; U2.F5@2104.04,1848.06 U2.G6@2135.54,1879.56 U2.G7@2135.54,1911.06 v1(2151.26,1926.78) U2.G8@2135.54,1942.53 ; U2.G8@2135.54,1942.55 U2.G9@2135.54,1974.05
  Layer 1 w10: v1(1108,2923) J1.2@1129.85,2923 ; J1.3@1141.66,2600.17 1141.83,2600.34 1141.83,2652.83 v1(1142,2653) ; J1.8@1200.72,2923 1200.86,2923.14 1200.86,2975.86 v1(1201,2976) ; J1.9@1212.53,2600.17 J1.11@1236.15,2600.17 ; v1(1232.33,2652) 1234.04,2650.3 1234.04,2602.28 J1.11@1236.15,2600.17 ; J1.13@1259.77,2600.17 J1.11@1236.15,2600.17 ; J1.14@1271.58,2923 1271.79,2923.21 1271.79,2976.79 v1(1272,2977) ; J1.19@1330.64,2600.17 1330.88,2600.41 1330.88,2653.95 v1(1331.13,2654.2) ; J1.20@1342.45,2923 1342.72,2923.28 1342.72,2976.72 v1(1343,2977) ; v1(1401,2654) 1401.25,2653.75 1401.25,2600.42 J1.25@1401.5,2600.17 ; J1.26@1413.31,2923 J1.28@1436.94,2923 1436.94,2973.94 1442.3,2979.3 1458.3,2979.3 v1(1460,2981) 1461.7,2979.3 1478.32,2979.3 1484.18,2973.44 J1.32@1484.18,2923 ; v1(1472,2653) 1472.18,2652.82 1472.18,2600.35 J1.31@1472.37,2600.17 ; J1.37@1543.24,2600.17 1545.21,2602.14 1545.21,2652.3 v1(1546.91,2654) ; J1.43@1614.1,2600.17 1614.29,2600.35 1614.29,2653.29 v1(1614.48,2653.48) ; J1.44@1625.91,2923 J1.46@1649.53,2923 ; v1(1650,2976) 1649.77,2975.77 1649.77,2923.23 J1.46@1649.53,2923 ; J1.48@1673.16,2923 J1.46@1649.53,2923 ; J1.49@1684.97,2600.17 v1(1685,2653) ; J1.55@1755.83,2600.17 1758.71,2603.04 1758.71,2634.54 1762.58,2638.41 1762.58,2643.26 1770.91,2651.59 v1(1770.91,2653.88) ; J1.61@1826.7,2600.17 J1.63@1850.32,2600.17 ; v1(1850,2653) 1850.16,2652.84 1850.16,2600.33 J1.63@1850.32,2600.17 ; J1.65@1873.94,2600.17 J1.63@1850.32,2600.17 ; J1.71@1944.81,2600.17 1944.9,2600.26 1944.9,2652.91 v1(1945,2653) ; U2.L22@2261.52,2383.5 2261.92,2383.9 2261.92,2406.63 v1(2262.32,2407.03)
  other v1: 2307.86,1896.21 2055.9,1927.7 2402.35,1927.7 2307.86,2022.19
GPIO0: J2.37 U2.T3
GPIO1: J2.39 U2.T1
GPIO2: J2.41 U2.U1
GPIO3: J2.43 U2.U2
GPIO4: J2.45 U2.V2
GPIO5: J2.47 U2.R3
GPIO6: J2.49 U2.R2
GPIO7: J2.51 U2.W2
GPIO24: J2.71 U2.W4
GPIO25: J2.73 U2.R4
GPIO26: J2.75 U2.T4
GPIO27: J2.77 U2.U5
GPIO28: J2.79 U2.W6
GPIO29: J2.72 U2.W5
GPIO30: J2.74 U2.U6
GPIO31: J2.76 U2.V5
GPIO32: J2.78 U2.R6
GPIO33: J2.80 U2.T6
GPIO34: J2.82 U2.Y6
GPIO35: J2.81 U2.AA6
GPIO36: J2.83 U2.V7
GPIO37: J2.85 U2.W7
GPIO38: J2.84 U2.AB7
GPIO39: J2.86 U2.AB6
GPIO40: J2.88 U2.V9
GPIO41: J2.87 U2.V8
GPIO42: J2.67 U2.AA8
GPIO43: J2.63 U2.AB8
GPIO44: J2.64 U2.Y8
GPIO45: J2.66 U2.Y7
GPIO46: J2.68 U2.W9
GPIO47: J2.100 U2.Y9
GPIO48: J2.101 U2.U7
GPIO49: J2.102 U2.F4
GPIO50: J2.103 U2.B1
GPIO51: J2.104 U2.A1
GPIO52: J2.106 U2.C2
GPIO53: J2.107 U2.B2
GPIO54: J2.108 U2.E1
GPIO55: J2.109 U2.D1
GPIO56: J2.111 U2.E2
GPIO57: J2.112 U2.D2
GPIO58: J2.113 U2.G1
GPIO59: J2.114 U2.F1
GPIO60: J2.116 U2.F3
GPIO61: J2.117 U2.E3
GPIO62: J2.118 U2.K1
GPIO63: J2.119 U2.J1
GPIO64: J2.121 U2.H2
GPIO65: J2.122 U2.G2
GPIO66: J2.123 U2.K2
GPIO67: J2.124 U2.J2
GPIO68: J2.126 U2.J5
GPIO69: J2.127 U2.H5
GPIO70: J2.128 U2.H3
GPIO71: J2.129 U2.G3
GPIO72: J2.131 U2.H4
GPIO73: J2.132 U2.G4
GPIO74: J2.133 U2.K4
GPIO75: J2.134 U2.J4
GPIO76: J2.136 U2.L3
GPIO77: J2.137 U2.K3
GPIO78: J2.138 U2.M1
GPIO79: J2.139 U2.L1
GPIO80: J2.141 U2.M3
GPIO81: J2.142 U2.M2
GPIO82: J2.143 U2.K6
GPIO83: J2.144 U2.J6
GPIO84: J2.146 U2.L5
GPIO85: J2.147 U2.L4
GPIO86: J2.148 U2.N4
GPIO87: J2.149 U2.N3
GPIO88: J2.151 U2.R1
GPIO89: J2.152 U2.P1
GPIO90: J2.153 U2.P5
GPIO91: J2.154 U2.P4
GPIO92: J2.156 U2.P2
GPIO93: J2.157 U2.N2
GPIO94: J2.158 U2.M6
GPIO95: J2.159 U2.M5
GPIO96: J2.161 U2.P6
GPIO97: J2.162 U2.N5
GPIO98: J2.163 U2.L6
GPIO99: J2.164 U2.AA9
GPIO100: J2.166 U2.AB10
GPIO101: J2.167 U2.AA10
GPIO102: J2.168 U2.AA11
GPIO103: J2.169 U2.V10
GPIO104: J2.171 U2.W10
GPIO105: J2.172 U2.Y11
GPIO106: J2.173 U2.Y12
GPIO107: J2.174 U2.W11
GPIO108: J2.176 U2.W12
GPIO109: J2.177 U2.V13
GPIO110: J2.178 U2.V14
GPIO111: J2.179 U2.U15
GPIO112: J2.181 U2.V15
GPIO113: J2.182 U2.T14
GPIO114: J2.183 U2.T15
GPIO115: J2.184 U2.W15
GPIO116: J2.186 U2.W16
GPIO117: J2.187 U2.T16
GPIO118: J2.188 U2.U16
INIT: J2.95 TP2.1 U2.U12
IO0: U1.29 U2.AB12
IO1: U1.30 U2.AB11
IO2: U1.31 U2.Y14
IO3: U1.32 U2.W14
IO4: U1.41 U2.AA14
IO5: U1.42 U2.Y13
IO6: U1.43 U2.AB15
IO7: U1.44 U2.AA15
M0: P3.2 U2.U11
M1: P2.2 U2.U10
M2: P1.2 U2.U9
MISO: J2.31 U2.R22
MOSI: J2.32 U2.P22
ODT0: J1.116 U2.M18
PROGRAM: J2.97 TP3.1 U2.N12
RAS: J1.110 U2.J21
RE: U1.8 U2.AA13
RESET: J1.30 U2.D14
SA0: J1.197 P5.4
SA1: J1.201 P5.2
SCL: J1.202 P5.3
SDA: J1.200 P5.1
TCK: J2.25 P4.2 U2.V12
TDI: J2.24 P4.3 U2.R13
TDO: J2.26 P4.1 U2.U13
TMS: J2.22 P4.4 U2.T13
Vdd: C53.2 C54.2 C55.2 C56.2 C57.2 C58.2 C59.2 C60.2 C61.2 C62.2 J1.75 J1.76 J1.81 J1.82 J1.87 J1.88 J1.93 J1.94 J1.99 J1.100 J1.105 J1.106 J1.111 J1.112 J1.117 J1.118 J1.123 J1.124 | length 2067.9
  Layer 1 w7.7: J1.75@2086.54,2600.17 2090.57,2604.19 2090.57,2646.13 2096.44,2652 2152.9,2652 ; J1.76@2098.35,2923 2098.35,2970.91 2103.44,2976 2164.93,2976 ; J1.81@2157.41,2600.17 2157.41,2647.49 2152.9,2652 ; J1.82@2169.22,2923 2169.44,2923.22 2169.44,2971.49 2164.93,2976 ; J1.87@2228.27,2600.17 2228.27,2647.49 2223.76,2652 2152.9,2652 ; J1.88@2240.09,2923 2240.09,2975 ; J1.93@2299.14,2600.17 2299.14,2647.49 2294.63,2652 2365.5,2652 ; J1.94@2310.95,2923 2310.95,2969.49 2305.44,2975 ; J1.99@2370.01,2600.17 2370.01,2647.49 2365.5,2652 ; J1.100@2381.82,2923 2381.82,2969.62 2376.44,2975 ; J1.105@2440.87,2600.17 2440.87,2647.49 2436.36,2652 2365.5,2652 ; J1.106@2452.68,2923 2452.68,2969.76 2447.44,2975 ; J1.111@2511.74,2600.17 2513.44,2601.87 2513.44,2647.49 2478.23,2682.7 2436.3,2682.7 2426,2693 2373,2693 2365.5,2685.5 2365.5,2652 ; J1.112@2523.55,2923 2523.55,2969.89 2518.44,2975 ; J1.117@2582.61,2600.17 2582.61,2646.83 2577.44,2652 2648.96,2652 2653.47,2647.49 J1.123@2653.47,2600.17 ; J1.118@2594.42,2923 2594.44,2970 2589.44,2975 ; J1.124@2665.28,2923 2664.44,2923.84 2664.44,2970 2659.44,2975 2589.44,2975 ; 2164.93,2976 2239.09,2976 2240.09,2975 ; 2240.09,2975 2305.44,2975 ; 2305.44,2975 2376.44,2975 ; 2376.44,2975 2447.44,2975 ; 2447.44,2975 2518.44,2975 ; 2518.44,2975 2589.44,2975
VN: J2.92 U2.M9
VP: J2.91 U2.L10
Vrefca: C41.2 C42.1 C43.2 C44.1 C45.2 C46.1 C47.2 C48.1 C49.2 C50.1 C51.2 C52.1 J1.1 J1.126 J1.203 J1.204
WE: J1.113 U2.H19
WE_NAND: U1.18 U2.AA16 | length 21
  Layer 1 w4.92: U2.AA16@2576.48,2194.52 v1(2591.33,2209.37)
WP: U1.19 U2.AB16
pads on no net: J1. J1.74 J1.77 J1.120 J1.121 J1.122 J1.125 J1.198 J1.P$1 J1.P$2 U1.1 U1.2 U1.3 U1.4 U1.5 U1.6 U1.10 U1.11 U1.14 U1.15 U1.20 U1.21 U1.22 U1.23 U1.24 U1.26 U1.27 U1.28 U1.33 U1.35 U1.38 U1.40 U1.45 U1.46 U1.47 U2.A4 U2.A6 U2.A8 U2.A10 U2.B4 U2.B6 U2.B8 U2.B10 U2.C5 U2.C7 U2.C9 U2.C11 U2.D5 U2.D7 U2.D9 U2.D11 U2.E6 U2.E10 U2.F6 U2.F8 U2.F10

## Polygon pours and split planes (outlines as drawn)
no net on Layer 2 (split plane): 4039.9,2658.32 3645.79,2264.21 3643.29,2261.17 3641.43,2257.69 3640.29,2253.92 3639.9,2250 3639.9,1020.1 1020.1,1020.1 1020.1,2250 1019.71,2253.92 1018.57,2257.69 1016.71,2261.17 1014.21,2264.21 620.1,2658.32 620.1,3399.9 4039.9,3399.9
no net on Layer 4 (split plane): 4039.9,2658.32 3645.79,2264.21 3643.29,2261.17 3641.43,2257.69 3640.29,2253.92 3639.9,2250 3639.9,1020.1 1020.1,1020.1 1020.1,2250 1019.71,2253.92 1018.57,2257.69 1016.71,2261.17 1014.21,2264.21 620.1,2658.32 620.1,3399.9 4039.9,3399.9
no net on Layer 5 (split plane): 4039.9,2658.32 3645.79,2264.21 3643.29,2261.17 3641.43,2257.69 3640.29,2253.92 3639.9,2250 3639.9,1020.1 1020.1,1020.1 1020.1,2250 1019.71,2253.92 1018.57,2257.69 1016.71,2261.17 1014.21,2264.21 620.1,2658.32 620.1,3399.9 4039.9,3399.9
no net on Layer 7 (split plane): 4039.9,2658.32 3645.79,2264.21 3643.29,2261.17 3641.43,2257.69 3640.29,2253.92 3639.9,2250 3639.9,1020.1 1020.1,1020.1 1020.1,2250 1019.71,2253.92 1018.57,2257.69 1016.71,2261.17 1014.21,2264.21 620.1,2658.32 620.1,3399.9 4039.9,3399.9